# Altium PCB LED_ind.PcbDoc
Units mm, origin at the board's own origin, x right, y up, seen from the top; angles counter-clockwise.
Board outline 37.95 x 7.72 mm, 2 copper layers (Top Layer, Bottom Layer); 43 components, 35 nets, 108 pads, 24 vias.
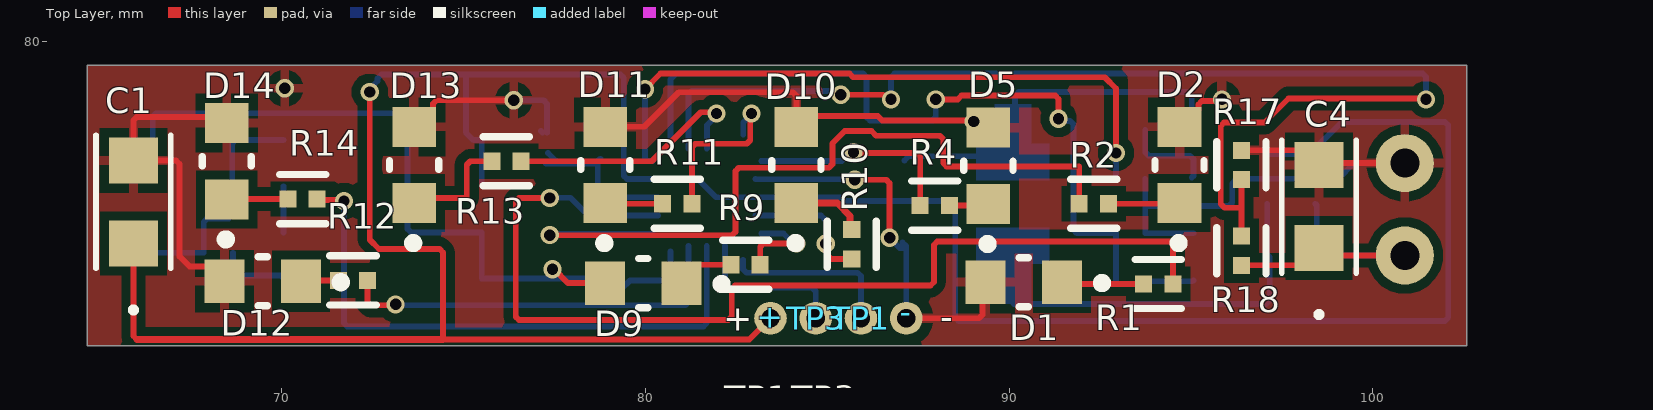
[diagram p0: Top Layer view]
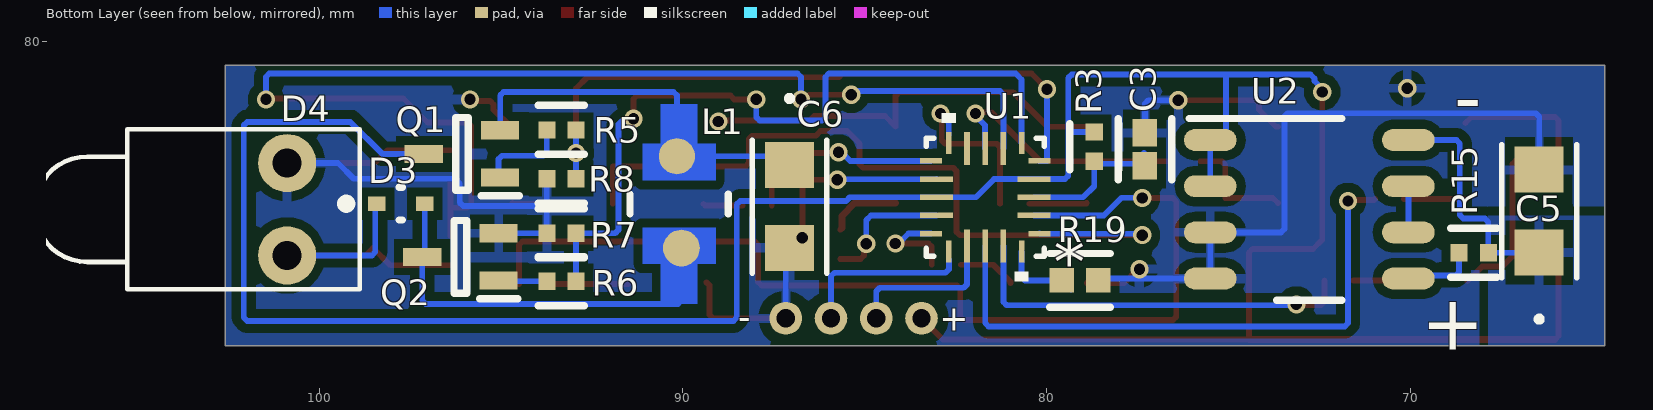
[diagram p1: Bottom Layer view, seen from below]
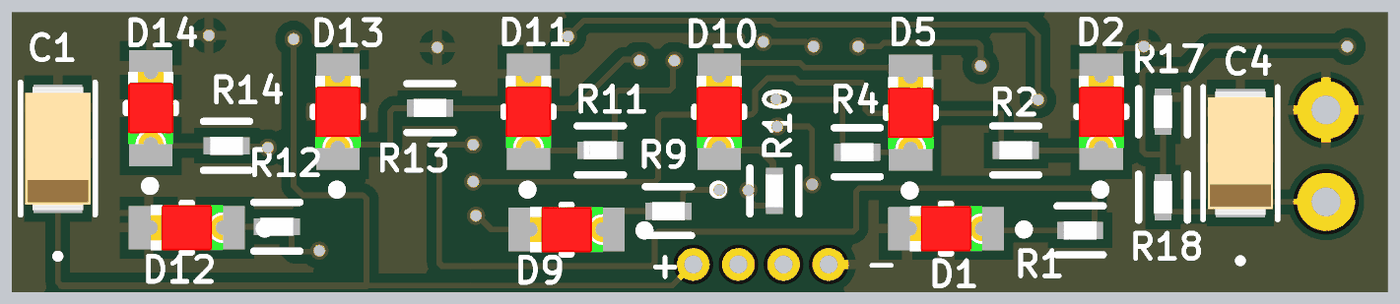
[diagram p2: 3D render of the assembled board from above, using the file's embedded part models]
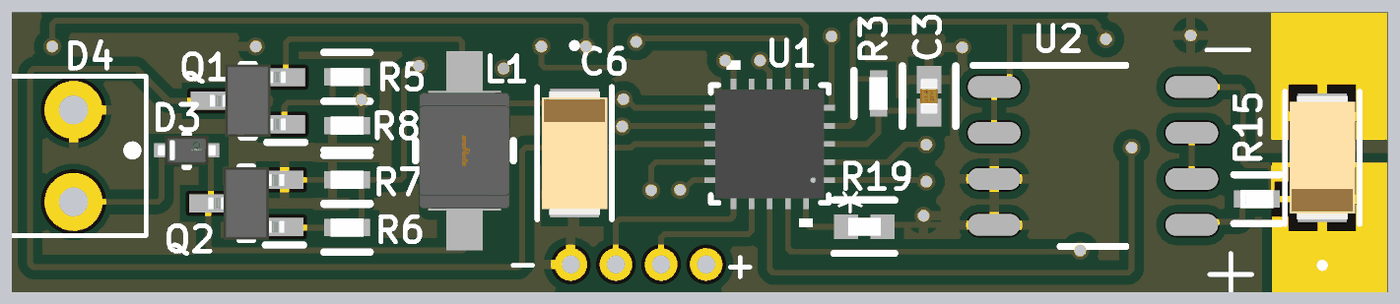
[diagram p3: 3D render of the assembled board from below, using the file's embedded part models]

## Layer stack, top to bottom
Top Solder: solder mask 0.0102, Solder Resist, Dk 3.5
Top Layer: signal copper 0.0356
Dielectric 1: dielectric 0.32, FR-4, Dk 4.8
Bottom Layer: signal copper 0.0356
Bottom Solder: solder mask 0.0102, Solder Resist, Dk 3.5

## Board outline
64.643,71.628 64.643,79.35 102.591,79.35 102.591,71.628

## Design rules (kind name [scope] priority, off if disabled: settings)
Clearance [All] p1: gap=0.254 ignorepadtopadclearanceinfootprint=FALSE except(0: Arc-Hole Track-Hole SMDPad-Hole THPad-Hole Via-Hole Fill-Hole Poly-Hole Region-Hole Text-Hole)
PolygonConnect [All] p1: connectstyle=Relief reliefconductorwidth=0.254 reliefentries=4 polygonreliefangle="90 Angle" airgapwidth=0.254
RoomDefinition LED_ind [InComponentClass('LED_ind')] p1: confinementstyle=ConfineIn formatcopy=TRUE lockcomponents=FALSE outline 55.654,61.773 109.957,61.773 109.957,104.013 55.654,104.013
RoutingVias [All] p1: holewidth=0.711 width=1.27 viastyle="Through Hole" minholewidth=0.711 minwidth=1.27 maxholewidth=0.711 maxwidth=1.27
SolderMaskExpansion [All] p1: expansion=0.102 istentingtop=FALSE
Width [All] p1: maxlimit=0.254 minlimit=0.16 preferedwidth=0.16 minimp=50.000000 maximp=50.000000 favimp=50.000000
30 further rules are at their usual default settings.

## Components (designator, comment, footprint, x,y, rotation, side; value= is the part's Value field where it differs from the comment)
+ "Test_Point_PCB" Test_Point 83.439,72.39 r0 top (schematic designator TP4)
- "Test_Point_PCB" Test_Point 87.173,72.39 r0 top (schematic designator TP2)
C1 "TAJA106K006RNJ" TAJA_AVX-L 65.913,75.588 r90 top (schematic designator C?)
C3 "C0805C104J4RACTU" Kemet_C0402-BB_IPC_A 77.292,77.038 r90 bottom
C4 "TAJA106K006RNJ" TAJA_AVX-L 98.527,75.463 r90 top
C5 "TAJA106K006RNJ" TAJA_AVX-L 66.446,75.336 r90 bottom
C6 "TAJA106K006RNJ" TAJA_AVX-L 87.071,75.463 r270 bottom
D1 "SML-LX1206GC-TR" Wurth_Electronics_0_MFG 90.407,73.381 r180 top locked
D2 "SML-LX1206GC-TR" Wurth_Electronics_0_MFG 94.691,76.606 r90 top locked
D3 "1PS79SB30_115" On_Semiconductor_502-01_MFG 97.765,75.54 r180 bottom
D4 "LED1" LED-1 100.889,75.387 r0 bottom
D5 "SML-LX1206GC-TR" Wurth_Electronics_0_MFG 89.433,76.581 r90 top locked
D9 "SML-LX1206GC-TR" Wurth_Electronics_0_MFG 79.942,73.355 r180 top locked
D10 "SML-LX1206GC-TR" Wurth_Electronics_0_MFG 84.15,76.606 r90 top locked
D11 "SML-LX1206GC-TR" Wurth_Electronics_0_MFG 78.892,76.606 r90 top locked
D12 "SML-LX1206GC-TR" Wurth_Electronics_0_MFG 69.469,73.406 r180 top locked
D13 "SML-LX1206GC-TR" Wurth_Electronics_0_MFG 73.635,76.606 r90 top locked
D14 "SML-LX1206GC-TR" Wurth_Electronics_0_MFG 68.478,76.708 r90 top locked
L1 "LQH32CN2R2M33L" Murata_LQH32CH_23_MFG 90.105,75.533 r270 bottom
Q1 "BSS138W" SOT65P210X110-3N 96.08,76.911 r0 bottom
Q2 "BSS138W" SOT65P210X110-3N 96.122,74.077 r0 bottom
R1 "100" Vishay_CRCW0402-e3_IPC_C 94.107,73.33 r180 top
R2 "100" Vishay_CRCW0402-e3_IPC_C 92.333,75.54 r0 top
R3 "10K" Vishay_CRCW0402-e3_IPC_C 78.689,77.11 r90 bottom
R4 "CRCW06031K00FKEA" Vishay_CRCW0402-e3_IPC_C 87.96,75.489 r0 top
R5 "CRCW06031K00FKEA" Vishay_CRCW0402-e3_IPC_C 93.345,77.572 r180 bottom
R6 "CRCW06031K00FKEA" Vishay_CRCW0402-e3_IPC_C 93.345,73.406 r180 bottom
R7 "CRCW06031K00FKEA" Vishay_CRCW0402-e3_IPC_C 93.345,74.727 r0 bottom
R8 "CRCW06031K00FKEA" Vishay_CRCW0402-e3_IPC_C 93.345,76.225 r0 bottom
R9 "CRCW06031K00FKEA" Vishay_CRCW0402-e3_IPC_C 82.753,73.863 r180 top
R10 "CRCW06031K00FKEA" Vishay_CRCW0402-e3_IPC_C 85.674,74.422 r90 top
R11 "CRCW06031K00FKEA" Vishay_CRCW0402-e3_IPC_C 80.874,75.54 r180 top
R12 "CRCW06031K00FKEA" Vishay_CRCW0402-e3_IPC_C 71.954,73.431 r180 top
R13 "CRCW06031K00FKEA" Vishay_CRCW0402-e3_IPC_C 76.175,76.708 r180 top
R14 "CRCW06031K00FKEA" Vishay_CRCW0402-e3_IPC_C 70.565,75.667 r180 top
R15 "CRCW06031K00FKEA" Vishay_CRCW0402-e3_IPC_C 68.25,74.193 r180 bottom
R17 "CRCW06031K00FKEA" Vishay_CRCW0402-e3_IPC_C 96.393,74.248 r90 top
R18 "CRCW06031K00FKEA" Vishay_CRCW0402-e3_IPC_C 96.393,76.606 r90 top
R19 "10K" Vishay_CRCW0402-e3_IPC_A 79.076,73.431 r180 bottom
TP1 "Test_Point_PCB" Test_Point 85.928,72.39 r0 top locked
TP3 "Test_Point_PCB" Test_Point 84.684,72.39 r0 top
U1 "STM32L011F4U6TR" UFQFPN20_3x3x0p6 81.686,75.717 r0 bottom locked
U2 "LP2951-30D" D0008A_N 72.771,75.387 r180 bottom

## Footprints (in the part's own frame and the unit in brackets; to place one, negate y for a bottom-side part, rotate by r counter-clockwise, add the part's x,y. Pads: shape width x height; smd on the part's side, far side on the other; paste and mask are expansions set on the pad)
D0008A_N [mm]
  oval 1.45x0.6 smd paste+0 mask+0.051: 1(-2.725,1.905) 2(-2.725,0.635) 3(-2.725,-0.635) 4(-2.725,-1.905) 5(2.725,-1.905) 6(2.725,-0.635) 7(2.725,0.635) 8(2.725,1.905)
  silkscreen extent -3.3,-2.5 0.9,2.5, body extent 0,0 0.25,0.25, height 0.25
Kemet_C0402-BB_IPC_A [mm]
  rect 0.765x0.672 smd paste+0 mask+0: 1(-0.454,0) 2(0.454,0)
  silkscreen extent -0.84,-0.74 0.84,0.74, body extent -0.5,-0.25 0.5,0.25, height 0.55
LED-1 [mm] "LED; 2 Leads"
  round 1.6 hole 0.8: 1(0,1.27) 2(0,-1.27)
  silkscreen extent -2,-2.2 6.95,2.2
Murata_LQH32CH_23_MFG [mm]
  round 0.995 smd paste+0 mask+0: 1(-1.312,-0.062)
  round 1.012 smd paste+0 mask+0: 2(1.212,0.062)
  Top Layer region: 0.65,-1 0.65,1 1.65,1 1.65,0.5 2.75,0.5 2.75,-0.5 1.65,-0.5 1.65,-1
  Top Layer region: -1.65,-1 -1.65,-0.5 -2.75,-0.5 -2.75,0.5 -1.65,0.5 -1.65,1 -0.65,1 -0.65,-1
  silkscreen extent -0.27,-1.35 0.27,1.35, body extent -1.6,-1.25 1.6,1.25, height 2.2
On_Semiconductor_502-01_MFG [mm]
  rect 0.48x0.4 smd paste+0 mask+0: 1(-0.66,0) 2(0.66,0)
  silkscreen extent -1.63,-0.45 0.05,0.45, body extent -0.8,-0.4 0.8,0.4, height 0.7
SOT65P210X110-3N [mm]
  rect 1.05x0.5 smd: 1(-1.05,0.65) 2(-1.05,-0.65) 3(1.05,0)
  silkscreen extent -1.58,-1 0.18,1.15, body extent -1.05,-1 1.05,1, height 1.1
TAJA_AVX-L [mm]
  rect 1.262x1.347 smd paste+0 mask+0: 1(-1.141,0) 2(1.141,0)
  silkscreen extent -3.05,-1.03 1.83,1.03, body extent -1.7,-0.9 1.7,0.9, height 1.85
Test_Point [mm]
  round 0.9 hole 0.5 unplated paste+0.1 mask+0.1: 1(0,0)
UFQFPN20_3x3x0p6 [mm]
  rect 0.605x0.153 smd paste+0 mask+0: 1(-1.496,1) 5(-1.496,-1) 11(1.496,-1) 15(1.496,1)
  rect 0.91x0.153 smd paste+0 mask+0: 2(-1.344,0.5) 3(-1.344,0) 4(-1.344,-0.5) 12(1.344,-0.5) 13(1.344,0) 14(1.344,0.5)
  rect 0.153x0.605 smd paste+0 mask+0: 6(-1,-1.496) 10(1,-1.496) 16(1,1.496) 20(-1,1.496)
  rect 0.153x0.91 smd paste+0 mask+0: 7(-0.5,-1.344) 8(0,-1.344) 9(0.5,-1.344) 17(0.5,1.344) 18(0,1.344) 19(-0.5,1.344)
  silkscreen extent -1.63,-2.31 1.63,2.31, body extent -1.5,-1.5 1.5,1.5, height 0.61
Vishay_CRCW0402-e3_IPC_A [mm]
  rect 0.668x0.672 smd paste+0 mask+0: 1(-0.502,0) 2(0.502,0)
  silkscreen extent -0.84,-0.74 0.84,0.74, body extent -0.5,-0.25 0.5,0.25, height 0.4
Vishay_CRCW0402-e3_IPC_C [mm]
  rect 0.468x0.472 smd paste+0 mask+0: 1(-0.402,0) 2(0.402,0)
  silkscreen extent -0.64,-0.67 0.64,0.67, body extent -0.74,-0.38 0.74,0.38, height 0.25
Wurth_Electronics_0_MFG [mm]
  rect 1.1x1.2 smd paste+0 mask+0: 1(-1.05,0) 2(1.05,0)
  silkscreen extent -2.28,-0.67 0.13,0.67, body extent -1.7,-0.77 1.7,0.77, height 0.25

## Part data
+ - TP1 TP3: library part TP_PCB?, "Test_Point"
C1 C4 C5 C6: "No Description Available", Mfr_Name="KYOCERA AVX", Copyright="Copyright (C) 2022 Ultra Librarian. All rights reserved.", Manufacturer_Part_Number=TAJA106K006RNJ, RefDes=RefDes, Type=DEV
D4: "Typical RED GaAs LED", LatestRevisionDate=08-Jul-2005, LatestRevisionNote="Mech Layer 1 removed.", PackageDescription="LED; 2 Leads", PackageReference=LED-1, Published=8-Jun-2000, Publisher="Altium Limited"
R1 R2 R3 R19: library part CRCW06031K00FKEA, "CRCW06031K00FKEA"
R4 R9 R10 R11 R12 R13 R14 R15: "100"
R5 R6: "1K"
R7 R8: "47K"
R17: "20K"
R18: "100K"
U1: "No Description Available", Mfr_Name=STMicroelectronics, Copyright="Copyright (C) 2022 Ultra Librarian. All rights reserved.", Manufacturer_Part_Number=STM32L011F4U6TR, RefDes=RefDes, Type=DEV
U2: "No Description Available", Mfr_Name="Texas Instruments", Copyright="Copyright (C) 2022 Ultra Librarian. All rights reserved.", Manufacturer_Part_Number=LP2951-30D, RefDes=RefDes, Type=DEV

## Via types
v1: diameter 0.5, hole 0.311, Top Layer to Bottom Layer, tented both sides, 24 vias

## Nets (pads, with @x,y where several pads share a name; then routed paths per layer and width w, separated by ;. In a path a pad name is that pad's centre, name@x,y a point inside that pad or via, vN(x,y) a via of type N, cw(c..) or ccw(c..) an arc to the next point about the centre after c; other vN are vias at no path point)
GND: -.1 C1.2 C3.2 C4.2 C5.2 C6.2 D1.2 D2.2 D4.2 D5.2 D9.2 D10.2 D11.2 D12.2 D13.2 D14.2 Q2.2 R7.2 R8.2 R18.2 R19.2 U1.12 U2.3 U2.4 | length 73.1
  Top Layer w0.16: D12.2 68.013,73.812 67.462,73.812 67.183,74.092 67.183,76.632 67.086,76.729 C1.2 65.913,77.833 66.007,77.927 68.309,77.927 D14.2 ; D13.2 73.685,77.656 74.155,78.126 74.155,78.291 74.248,78.384 v1(76.378,78.384) ; v1(77.445,73.736) 77.489,73.736 77.87,73.355 D9.2 ; D11.2 79.97,77.656 80.919,78.605 84.056,78.605 84.15,78.512 D10.2 84.445,77.952 86.388,77.952 86.513,77.826 89.001,77.826 v1(89.027,77.8) ; v1(85.754,76.2) 86.622,76.2 86.716,76.106 v1@86.716,74.752 ; -.1 89.178,72.39 89.271,72.484 89.271,73.295 D1.2 ; D2.2@94.741,77.656 95.211,78.126 95.211,78.272 95.305,78.365 95.815,78.365 v1(95.86,78.41) ; R18.2 98.122,77.009 C4.2 98.579,76.657 D4.2
  Bottom Layer w0.16: C5.2 66.446,77.935 66.54,78.029 73.363,78.029 73.457,77.935 73.457,74.846 73.551,74.752 U2.3 U2.4 78.523,73.482 R19.2 ; v1(76.378,78.384) 77.198,78.384 77.292,78.291 C3.2 ; C3.2@77.118,77.546 C3.2@77.169,77.495 ; U1.12 83.034,76.214 85.741,76.214 v1(85.754,76.2) ; v1(86.716,74.602) 86.995,74.322 C6.2 ; C6.2@87.071,74.473 87.173,74.371 -.1 ; R8.2 93.747,75.476 ; Q2.2 R7.2 93.747,75.476 ; D4.2 99.492,76.657 99.06,76.225 96.266,76.225 96.139,76.098 96.139,75.57 96.045,75.476 93.747,75.476
  other v1: 70.079,78.715
NetC3_1: C3.1 R3.1 U1.3 | length 4.2
  Bottom Layer w0.16: C3.1@77.267,76.639 R3.1@78.622,76.639 ; C3.1@77.318,76.937 C3.1@77.524,76.73 ; R3.1 R3.1@78.689,76.706 ; R3.1@78.759,76.775 R3.1@78.689,76.706 ; U1.3 78.994,75.717 78.689,76.022 R3.1@78.689,76.706
NetC4_1: C4.1 D3.1 D4.1 R17.1 | length 8.6
  Top Layer w0.16: R17.1 98.05,73.846 C4.1 98.732,74.117 D4.1
  Bottom Layer w0.16: D3.1 98.465,75.5 98.465,74.211 98.558,74.117 D4.1
NetC5_1: C5.1 R15.2 U2.8 | length 6.5
  Bottom Layer w0.16: C5.1 66.448,74.193 R15.2 ; R15.2@67.848,74.196 67.848,75.039 67.941,75.133 68.537,75.133 68.631,75.227 68.631,77.198 68.725,77.292 U2.8
NetC6_1: C6.1 L1.1 Q1.2 | length 10.7
  Bottom Layer w0.16: C6.1@87.122,76.731 87.236,76.845 L1.1 90.168,78.523 90.26,78.614 94.936,78.614 95.03,78.521 Q1.2
NetD1_1: D1.1 R1.2 | length 2.3
  Top Layer w0.16: D1.1 91.508,73.33 R1.2
NetD2_1: D2.1 R2.2 | length 2
  Top Layer w0.16: R2.2 94.632,75.54 94.653,75.518 D2.1
NetD3_2: D3.2 L1.2 Q2.3 | length 11.3
  Bottom Layer w0.16: L1.2 90.043,72.877 90.137,72.783 97.078,72.783 97.172,72.877 Q2.3 97.105,74.144 D3.2
NetD5_1: D5.1 R4.2 | length 1.1
  Top Layer w0.16: R4.2 89.391,75.489 D5.1
NetD9_1: D9.1 R9.2 | length 1.6
  Top Layer w0.16: D9.1 80.992,73.393 81.462,73.863 R9.2
NetD10_1: D10.1 R10.2 | length 2
  Top Layer w0.16: R10.2@85.628,74.87 R10.2
  Top Layer w0.19: D10.1 85.276,75.556 85.628,75.205 R10.2@85.628,74.87
NetD11_1: D11.1 R11.2 | length 1.6
  Top Layer w0.16: D11.1 78.909,75.54 R11.2
NetD12_1: D12.1 R12.2 | length 1
  Top Layer w0.16: D12.1 70.544,73.431 R12.2
NetD13_1: D13.1 R13.2 | length 3.2
  Top Layer w0.16: D13.1 73.774,75.696 75.082,75.696 75.082,76.614 75.176,76.708 R13.2
NetD14_1: D14.1 R14.2 | length 1.7
  Top Layer w0.16: D14.1 68.487,75.667 R14.2
NetQ1_1: Q1.1 R5.1 | length 2.5
  Bottom Layer w0.16: R5.1 93.747,76.954 93.841,76.86 94.978,76.86 95.072,76.767 95.072,76.304 Q1.1
NetQ2_1: Q2.1 R6.1 | length 1.3
  Bottom Layer w0.16: R6.1 95.051,73.406 Q2.1
NetR1_1: R1.1 U1.2 | length 28.5
  Top Layer w0.16: v1(77.368,75.698) 76.522,75.698 76.429,75.604 76.429,72.433 76.522,72.339 82.278,72.339 82.372,72.433 82.372,73.199 82.466,73.293 82.783,73.293 87.841,73.293 87.935,73.387 87.935,74.404 88.029,74.498 94.415,74.498 94.509,74.404 R1.1
  Bottom Layer w0.16: v1(77.368,75.698) 77.377,75.706 77.938,75.706 78.427,75.217 U1.2
NetR2_1: R2.1 U1.1 | length 21.7
  Top Layer w0.16: v1(77.368,74.676) 77.372,74.672 82.38,74.672 82.474,74.766 82.474,76.436 82.568,76.53 85.047,76.53 85.141,76.624 85.141,77.195 85.483,77.538 86.216,77.538 86.342,77.412 88.095,77.412 88.189,77.318 88.189,76.657 88.283,76.563 91.923,76.563 91.931,76.555 R2.1
  Bottom Layer w0.16: v1(77.368,74.676) 77.409,74.716 80.189,74.716 U1.1
NetR4_1: R4.1 U1.11 | length 5.9
  Top Layer w0.16: v1(85.725,76.954) 85.742,76.937 87.464,76.937 87.558,76.843 R4.1@87.558,75.491
  Bottom Layer w0.16: U1.11 85.397,76.717 85.633,76.954 v1(85.725,76.954)
NetR5_2: R5.2 R8.1 U1.5 | length 18.6
  Top Layer w0.16: v1(79.984,78.689) 80.415,79.12 85.611,79.12 85.711,79.019 92.634,79.019 92.946,78.708 v1(92.946,76.937)
  Bottom Layer w0.16: v1(79.984,78.689) 79.984,76.721 79.988,76.717 U1.5 ; R8.1 R5.2
NetR6_2: R6.2 R7.1 U1.6 | length 20.7
  Top Layer w0.16: v1(87.986,78.41) 88.59,78.41 88.695,78.515 91.27,78.515 91.364,78.421 v1(91.364,77.876)
  Bottom Layer w0.16: U1.6 80.686,78.959 80.847,79.12 85.987,79.12 86.081,79.026 86.081,77.92 86.174,77.826 87.892,77.826 87.986,77.92 v1(87.986,78.41) ; v1(91.364,77.876) 91.421,77.819 91.68,77.819 91.773,77.726 91.773,74.821 91.867,74.727 R7.1 R6.2
NetR9_1: R9.1 U1.15 | length 2.6
  Top Layer w0.16: R9.1 83.155,74.354 83.249,74.447 v1(84.158,74.447)
  Bottom Layer w0.16: U1.15 83.796,74.717 84.066,74.447 v1(84.158,74.447)
NetR10_1: R10.1 U1.14 | length 3.7
  Top Layer w0.16: v1(84.957,74.439) 85.022,74.374 85.022,74.114 85.116,74.02 R10.1
  Bottom Layer w0.16: U1.14 84.828,75.217 84.957,75.088 v1(84.957,74.439)
NetR11_1: R11.1 U1.10 | length 4.7
  Top Layer w0.16: R11.1 81.276,77.097 81.369,77.191 82.786,77.191 82.88,77.284 82.88,77.985 v1(82.917,78.021)
  Bottom Layer w0.16: U1.10@82.69,77.436 82.69,77.776 82.917,78.003 v1(82.917,78.021)
NetR12_1: R12.1 U1.19 | length 11.1
  Top Layer w0.16: R12.1 72.356,72.839 72.45,72.746 73.101,72.746 v1(73.127,72.771)
  Bottom Layer w0.16: v1(73.127,72.771) 73.152,72.746 81.093,72.746 81.186,72.839 U1.19
NetR13_1: R13.1 U1.8 | length 7
  Top Layer w0.16: R13.1 80.17,76.708 81.517,78.055 81.922,78.055 v1(81.955,78.021)
  Bottom Layer w0.16: U1.8 81.69,77.065 81.69,77.698 81.955,77.963 v1(81.955,78.021)
NetR14_1: R14.1 U1.18 | length 16.3
  Top Layer w0.16: R14.1 70.993,75.641 71.679,75.641 v1(71.704,75.616)
  Bottom Layer w0.16: v1(71.704,75.616) 71.704,72.255 71.798,72.162 81.593,72.162 81.686,72.255 U1.18
NetR15_1: R15.1 U2.5 | length 2
  Bottom Layer w0.16: R15.1 68.652,73.66 68.746,73.566 69.962,73.566 U2.5
NetR17_2: R17.2 R18.1 U1.7 | length 33.5
  Top Layer w0.16: v1(85.369,78.536) 86.538,78.536 86.663,78.41 v1(86.755,78.41) ; R17.2 96.393,75.427 ; R18.1 96.393,75.427 ; v1(101.473,78.41) 101.448,78.435 97.688,78.435 97.028,77.775 95.916,77.775 95.823,77.681 95.823,75.533 95.928,75.427 96.393,75.427
  Bottom Layer w0.16: U1.7 81.186,78.545 81.28,78.639 85.174,78.639 85.277,78.536 v1(85.369,78.536) ; v1(86.755,78.41) 86.755,79.026 86.849,79.12 101.379,79.12 101.473,79.026 v1(101.473,78.41)
NetR19_1: R19.1 U1.20 | length 2.2
  Bottom Layer w0.16: R19.1@79.324,73.177 R19.1 80.594,73.431 80.69,73.527 80.69,74.218 U1.20
NetTP1_1: TP3.1 U1.17 | length 4.4
  Bottom Layer w0.16: U1.17 82.183,74.37 82.183,73.325 82.28,73.228 84.59,73.228 84.684,73.134 TP3.1
NetTP2_1: TP1.1 U1.16 | length 4.7
  Bottom Layer w0.16: U1.16@82.683,73.999 82.683,73.736 82.777,73.642 85.834,73.642 85.928,73.548 TP1.1
NetU2_6: U2.6 U2.7 | length 1.3
  Bottom Layer w0.16: U2.6 U2.7
VCC: +.1 C1.1 Q1.3 R3.2 U1.4 U1.13 U2.1 U2.2 | length 80
  Top Layer w0.16: C1.1 65.913,71.9 66.007,71.806 ; v1(72.415,78.613) 72.415,74.549 72.669,74.295 74.337,74.295 74.431,74.201 74.431,71.806 82.855,71.806 +.1
  Top Layer w0.19: 66.007,71.806 74.431,71.806
  Bottom Layer w0.16: v1(72.415,78.613) 72.415,78.705 72.626,78.915 72.626,78.982 72.739,79.096 75.062,79.096 75.062,77.495 75.265,77.292 U2.1 U2.2 ; 75.078,79.096 79.307,79.096 79.4,79.002 79.4,77.419 ; R3.2 79.307,77.512 79.4,77.419 ; Q1.3 98.273,76.911 99.153,77.791 101.989,77.791 102.083,77.697 102.083,72.408 101.989,72.314 88.613,72.314 88.519,72.408 88.519,75.522 88.425,75.616 85.512,75.616 85.411,75.717 U1.13 81.94,75.717 81.44,76.217 U1.4 79.494,76.217 79.4,76.311 79.4,77.419
pads on no net: U1.9

## Polygon pours and split planes (outlines as drawn)
GND on Bottom Layer "GND_L02_P010" (solid, pour order 10): 64.643,79.35 64.643,71.628 102.591,71.628 102.591,79.35
GND on Bottom Layer "GND_L02_P004" (solid, pour order 4): 64.643,75.844 67.843,75.844 67.843,79.35 64.643,79.35
NetC5_1 on Bottom Layer "NETC5_1_L02_P003" (solid, pour order 3): 67.843,75.209 67.843,71.628 64.643,71.628 64.643,74.752 64.643,75.209
no net on Bottom Solder "NONET_L02_P006" (solid, pour order 6): 67.854,75.209 67.854,71.628 64.653,71.628 64.653,74.752 64.653,75.209
no net on Bottom Solder "NONET_L02_P005" (solid, pour order 5): 64.653,75.838 67.853,75.838 67.853,79.343 64.653,79.343
GND on Top Layer "GND_L01_P009" (solid, pour order 9): 64.643,79.35 64.643,71.628 102.591,71.628 102.591,79.35

## Silkscreen, mask and mechanical layers (free items; w line width, h text height)
Top Overlay:
  text "-" at 88.113,72.091 h0.7
  text "+" at 82.144,72.045 h0.7
Bottom Overlay:
  text "-" at 68.021,77.724 h1.52
  text "+" at 67.945,71.526 h1.52
Mechanical 1:
  the board outline again, w0.254

## Text inside footprints (layer, text, board x,y; h text height)
U1: Bottom Overlay "*" at 78.935,75.102 h1.27 r180; Mechanical 13 "*" at 80.48,75.102 h1.27 r180